# Altium PCB 1819_Emmeteur_DCF.PcbDoc (part 2 of 2)
Units mm, origin at the board's own origin, x right, y up, seen from the top; angles counter-clockwise.
Board outline 107.7 x 106.68 mm, 2 copper layers (Top Layer, Bottom Layer); 106 components, 76 nets, 407 pads, 175 vias.
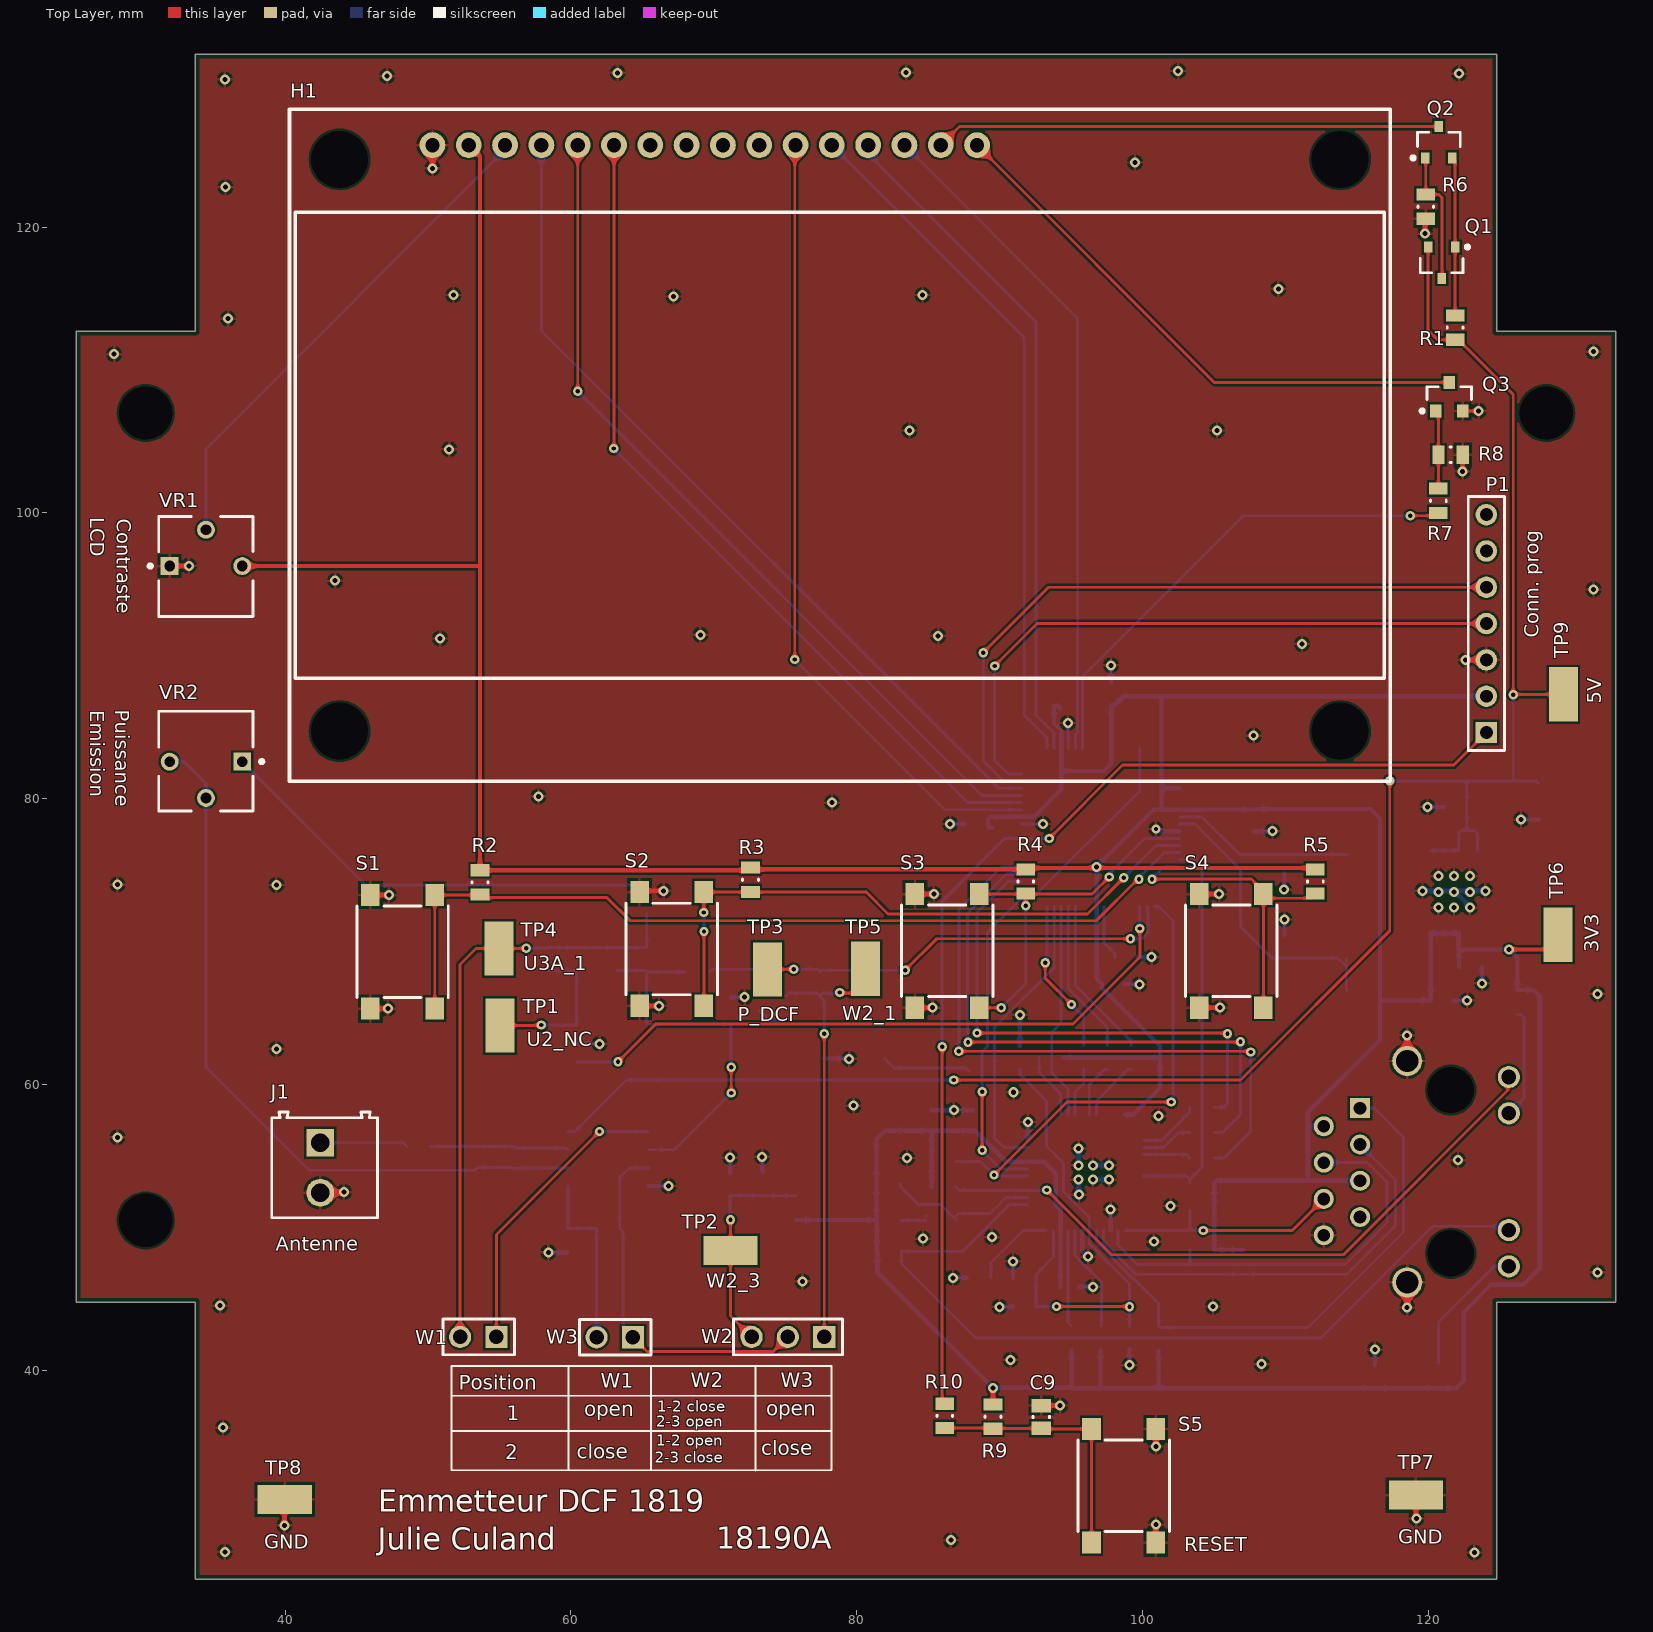
[diagram p0: Top Layer view]

## Via types
v1: diameter 0.7, hole 0.35, Top Layer to Bottom Layer, 126 vias
v2: diameter 0.65, hole 0.3, Top Layer to Bottom Layer, 49 vias

## Nets (pads, with @x,y where several pads share a name; then routed paths per layer and width w, separated by ;. In a path a pad name is that pad's centre, name@x,y a point inside that pad or via, vN(x,y) a via of type N, cw(c..) or ccw(c..) an arc to the next point about the centre after c; other vN are vias at no path point) (continued)
pads on no net: H1.7 H1.8 H1.9 H1.10 H1.17 J2.2 J2.3 J2.4 J2.6 J2.7 J2.8 J2.9 J2.10 J2.11 J3.4 J3.MH1 J3.MH2 P1.6 P1.7 U1.4 U1.5 U1.6 U1.8 U1.23 U1.24 U1.27 U1.28 U1.29 U1.31 U1.32 U1.33 U1.36 U1.37 U1.47 U1.48 U1.52 U1.53 U1.54 U1.55 U1.58 U1.59 U2.2 U2.3 U2.5 U4.1 U4.6 U4.8 U4.9 U4.16 U5.1 U5.5 U5.8 U5.9 U5.10 U5.11 U5.12 U5.25 U5.29 U5.33 U5.38 U5.42 U5.45 U5.46 X2.1

## Polygon pours and split planes (outlines as drawn)
GND on Top Layer "GND" (solid, pour order 4): 25.4,44.78 25.4,112.7 33.735,112.7 33.735,132.08 124.765,132.08 124.765,112.7 133.1,112.7 133.1,44.78 124.765,44.78 124.765,25.4 33.735,25.4 33.735,44.78
GND on Bottom Layer "GND" (solid, pour order 5): 25.4,44.78 25.4,112.7 33.735,112.7 33.735,132.08 124.765,132.08 124.765,112.7 133.1,112.7 133.1,44.78 124.765,44.78 124.765,25.4 33.735,25.4 33.735,44.78

## Silkscreen, mask and mechanical layers (free items; w line width, h text height)
Top Overlay:
  lines w0.127: 51.638,35.763 78.232,35.763 ; 51.638,38.227 78.232,38.227 ; 59.842,33.045 59.842,40.31 ; 65.608,33.045 65.608,40.31 ; 72.923,32.995 72.923,40.259 ; 51.638,33.02 78.232,33.02 78.232,40.31 51.638,40.31 51.638,37.44 51.638,33.02
  text "LCD" at 26.365,99.695 h1 r270
  text "Contraste" at 28.219,99.593 h1 r270
  text "Conn. prog" at 127.711,91.262 h1 r90
  text "5V" at 132.105,86.639 h1 r90
  text "Puissance" at 28.118,86.233 h1 r270
  text "Emission" at 26.365,86.182 h1 r270
  text "3V3" at 131.902,69.266 h1 r90
  text "U3A_1" at 56.693,67.996 h1
  text "W2_1" at 78.994,64.491 h1
  text "P_DCF" at 71.679,64.44 h1
  text "U2_NC" at 56.896,62.687 h1
  text "Antenne" at 39.345,48.362 h1
  text "W2_3" at 69.469,45.771 h1
  text "W3" at 74.701,38.837 h1.02
  text "W2" at 68.377,38.811 h1.02
  text "W1" at 62.103,38.786 h1.02
  text "Position" at 52.172,38.659 h1.02
  text "1-2 close" at 66.04,37.109 h0.76
  text "open" at 73.66,36.816 h1.02
  text "open" at 60.935,36.779 h1.02
  text "1" at 55.499,36.525 h1.02
  text "2-3 open" at 65.964,36.068 h0.76
  text "1-2 open" at 65.964,34.722 h0.76
  text "close" at 73.33,34.061 h1.02
  text "close" at 60.427,33.833 h1.02
  text "2" at 55.423,33.782 h1.02
  text "2-3 close" at 65.862,33.528 h0.76
  text "Emmetteur DCF 1819" at 46.533,30.099 h1.52
  text "GND" at 117.881,27.864 h1
  text "18190A" at 70.18,27.534 h1.52
  text "GND" at 38.557,27.508 h1
  text "Julie Culand" at 46.482,27.457 h1.52
  text "RESET" at 102.921,27.356 h1
Board shape:
  lines w0.2: 25.4,44.78 33.735,44.78 33.735,25.4 124.765,25.4 124.765,44.78 133.1,44.78 133.1,112.7 124.765,112.7 124.765,132.08 33.735,132.08 33.735,112.7 25.4,112.7 25.4,44.78
  lines w0.254: 25.4,44.78 25.4,112.7 33.735,112.7 33.735,132.08 124.765,132.08 124.765,112.7 133.1,112.7 133.1,44.78 124.765,44.78 124.765,25.4 33.735,25.4 33.735,44.78 25.4,44.78

## Text inside footprints (layer, text, board x,y; h text height)
D1: Bottom Overlay "+" at 83.345,50.221 h0.76 r270
J2: Mechanical 6 "PCB EDGE" at 131.928,87.043 h0.3 r90
U4: Mechanical 4 "*" at 119.061,77.865 h1.88 r90; Mechanical 4 "*" at 119.061,77.865 h1.88 r90